# Altium PCB PCB5.PcbDoc (part 1 of 4)
Units mil, origin at the board's own origin, x right, y up, seen from the top; angles counter-clockwise.
Board outline 1968.5 x 2362.2 mil, 4 copper layers (Top Layer, GND, VCC, Bottom Layer), stack 30.634 mil thick; 134 components, 248 nets, 1063 pads, 694 vias.
Unrouted connection lines stored in the file: 163.
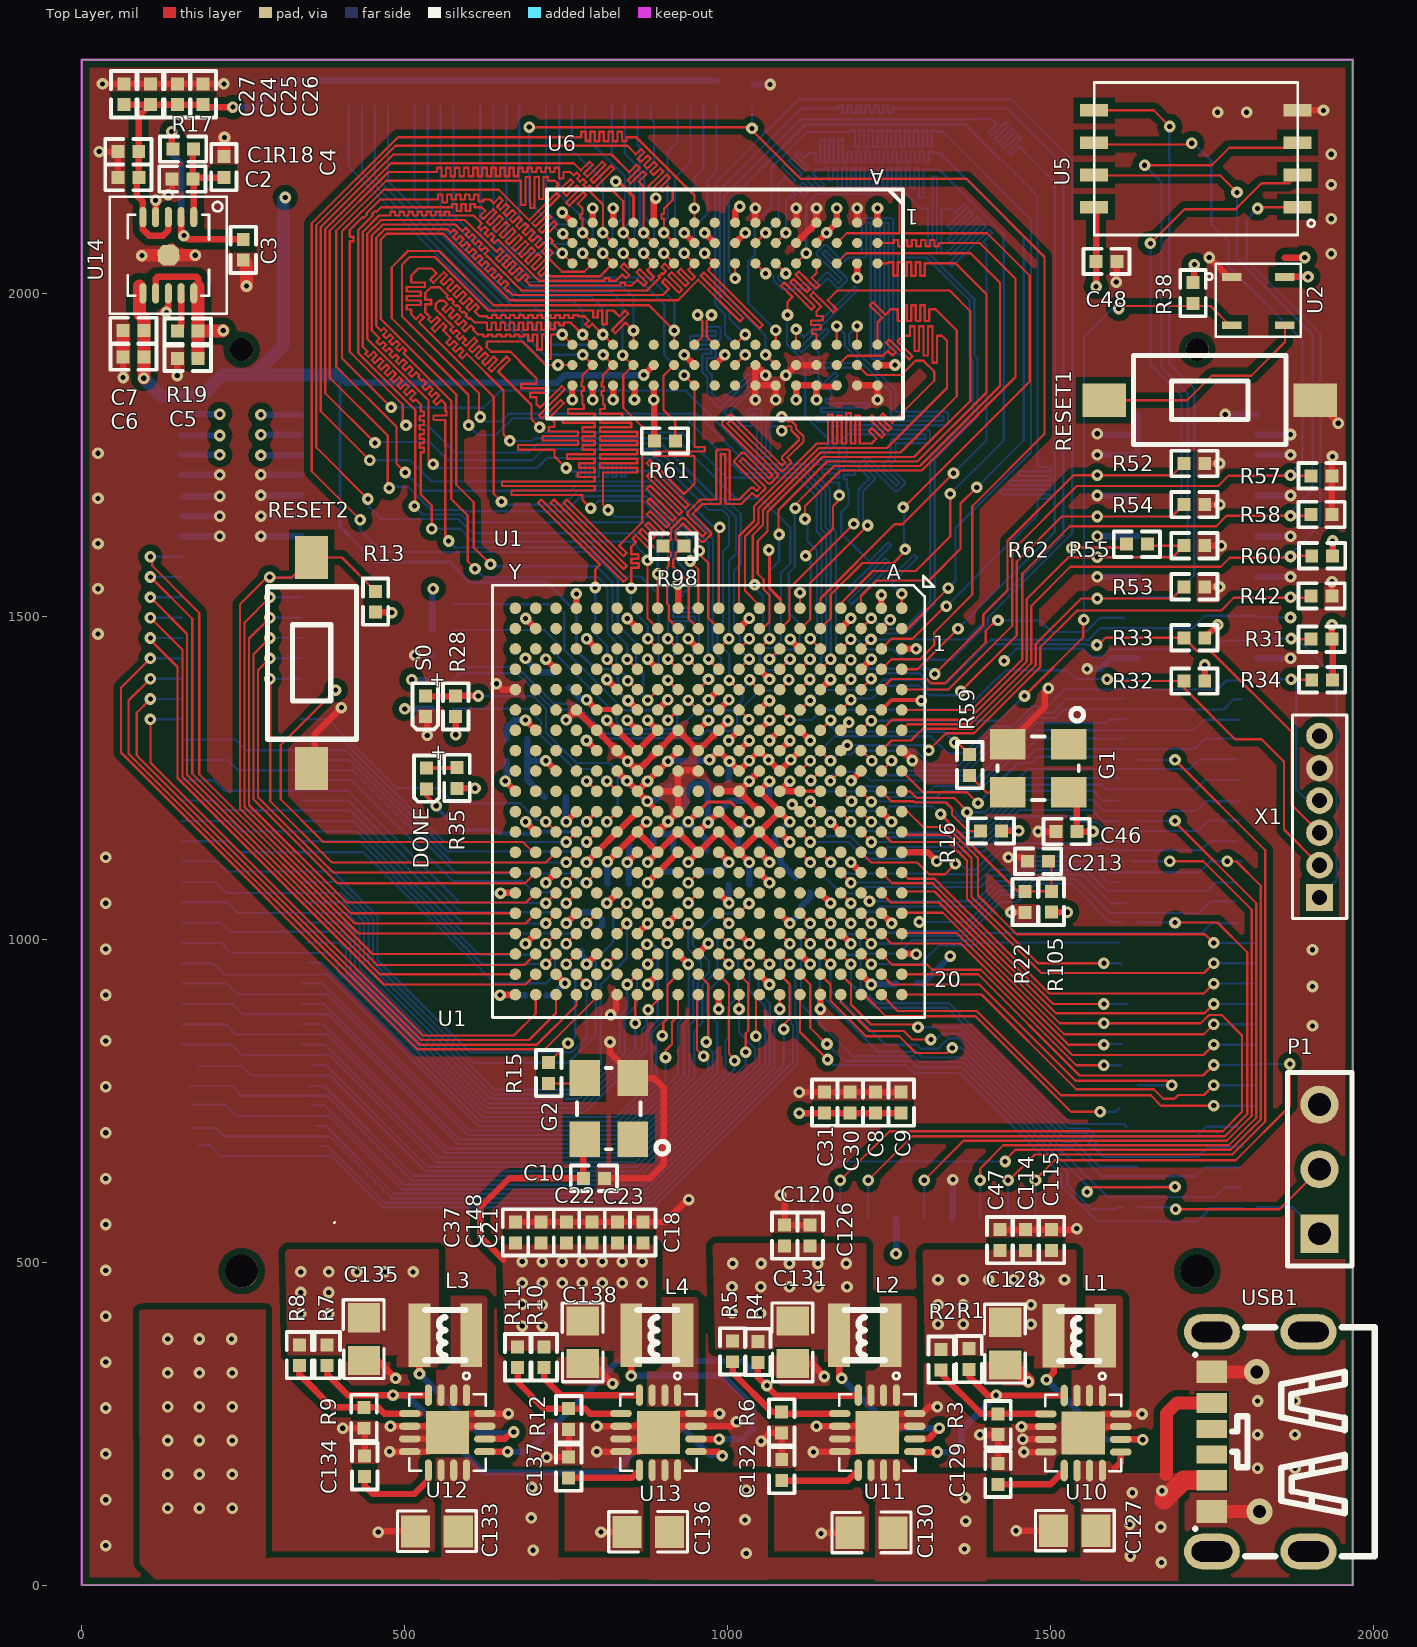
[diagram p0: Top Layer view]
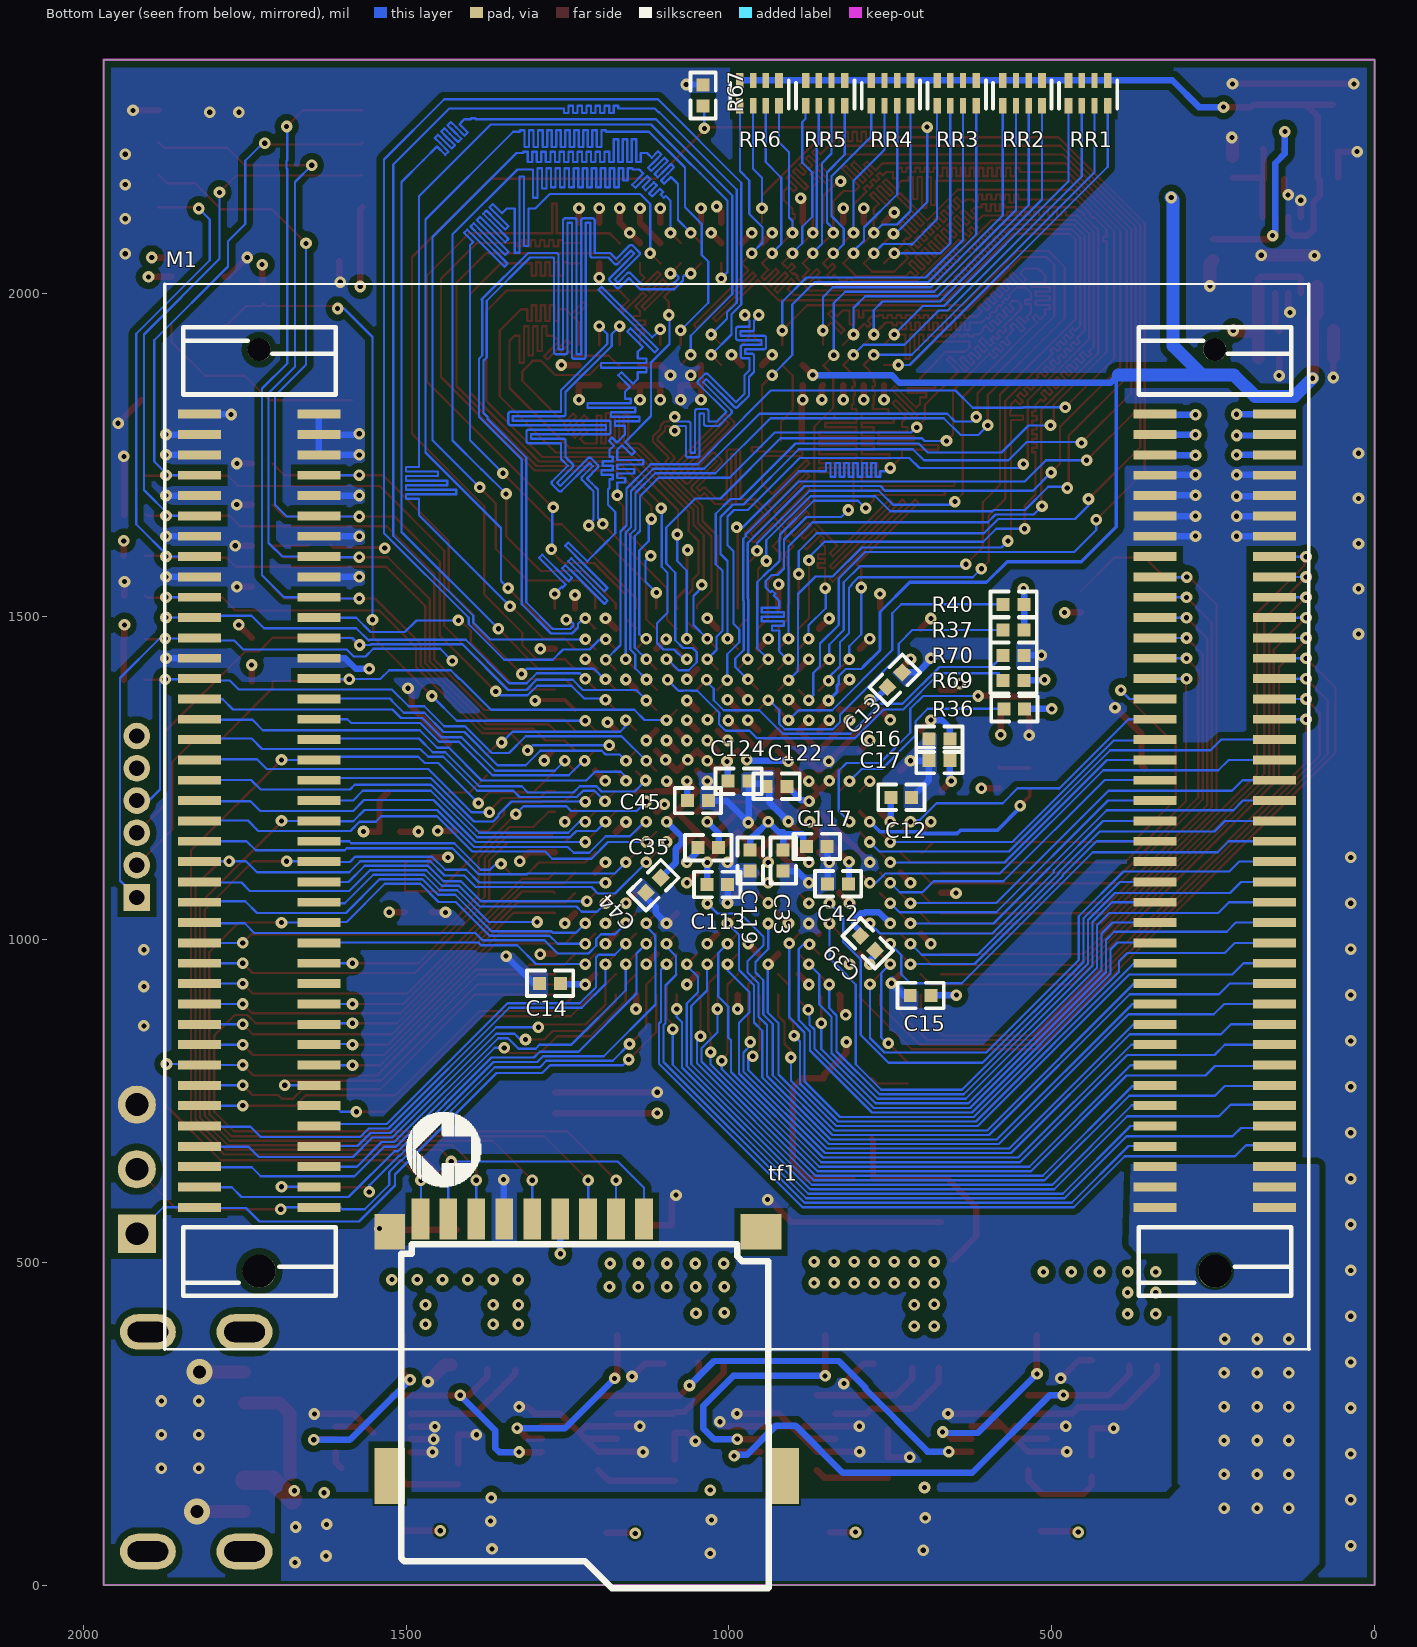
[diagram p1: Bottom Layer view, seen from below]
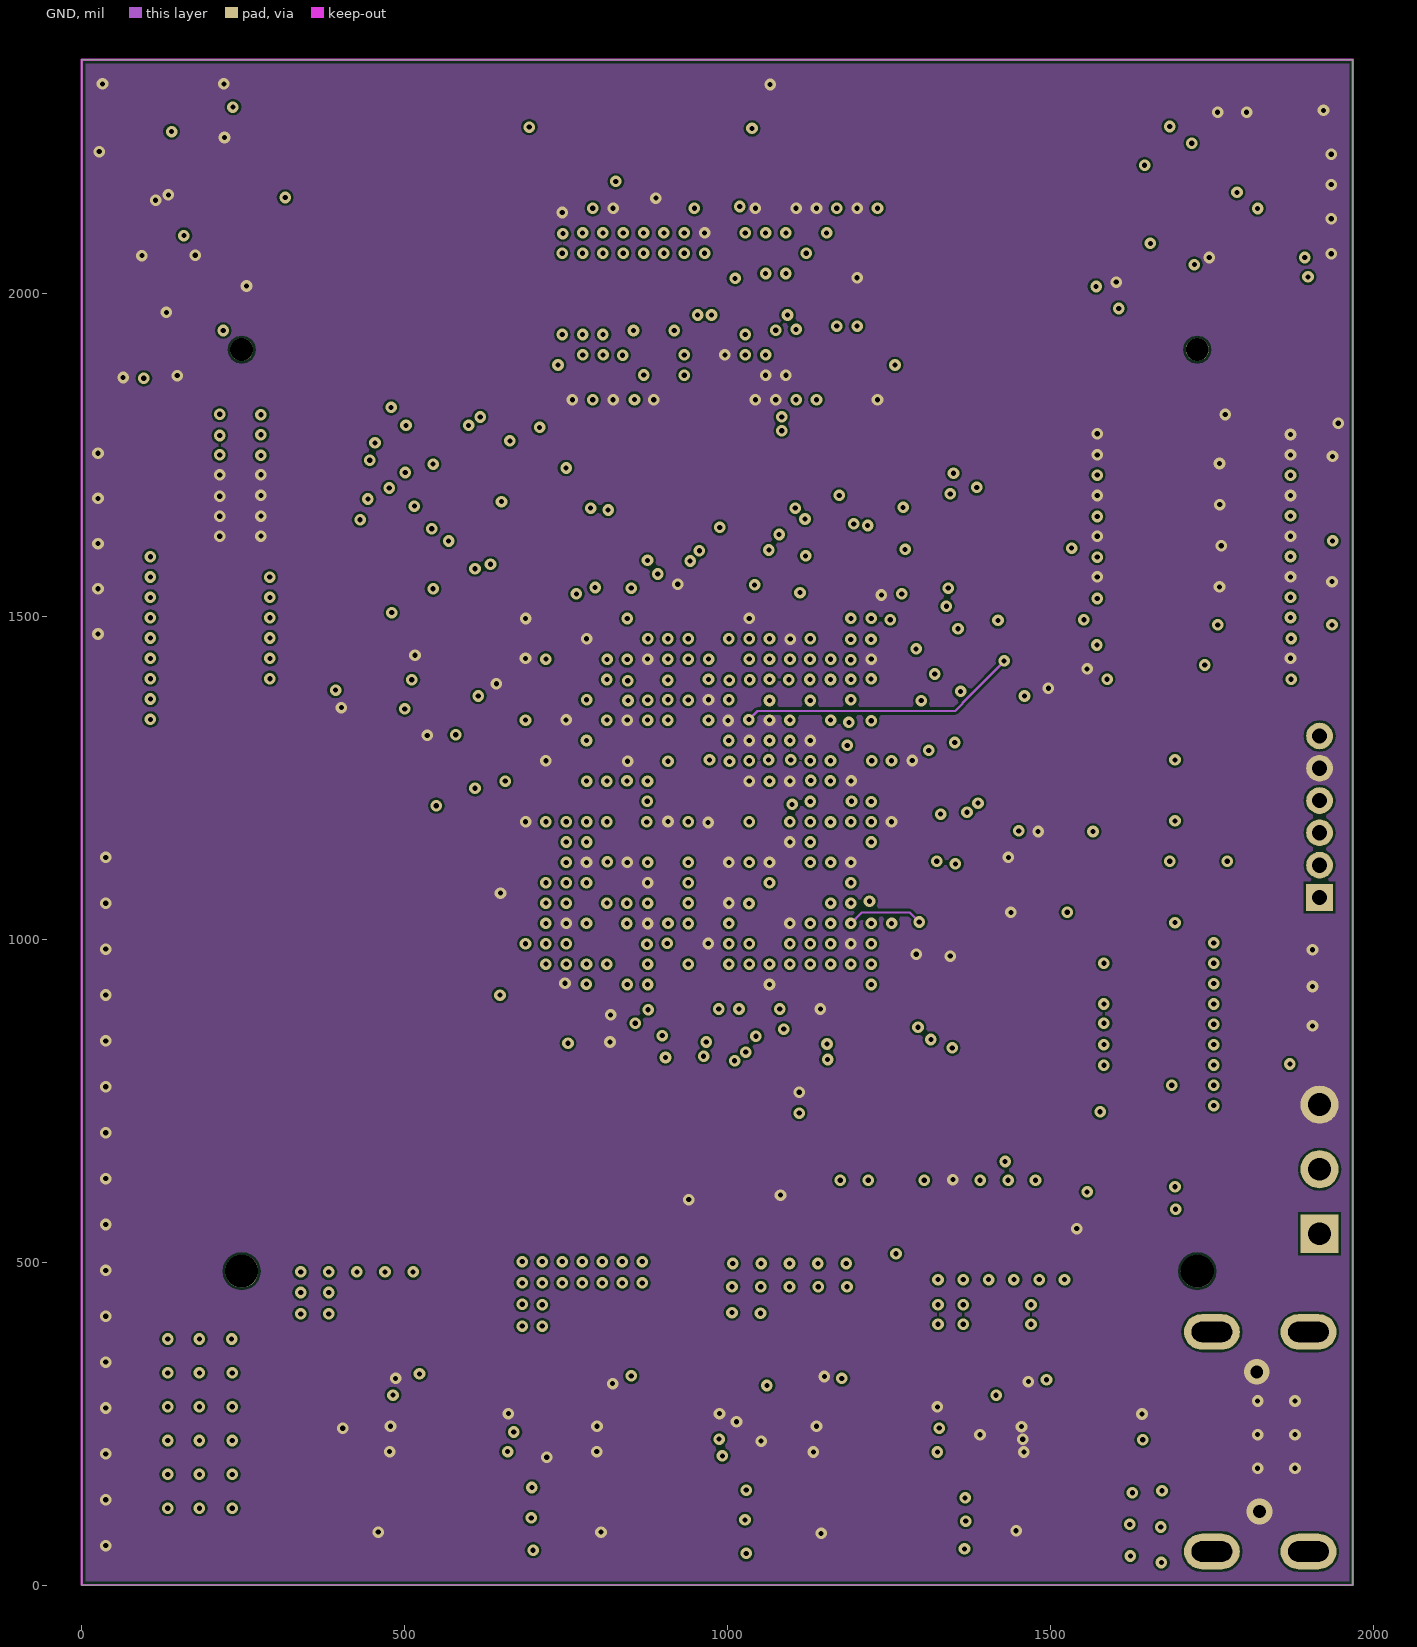
[diagram p2: GND]
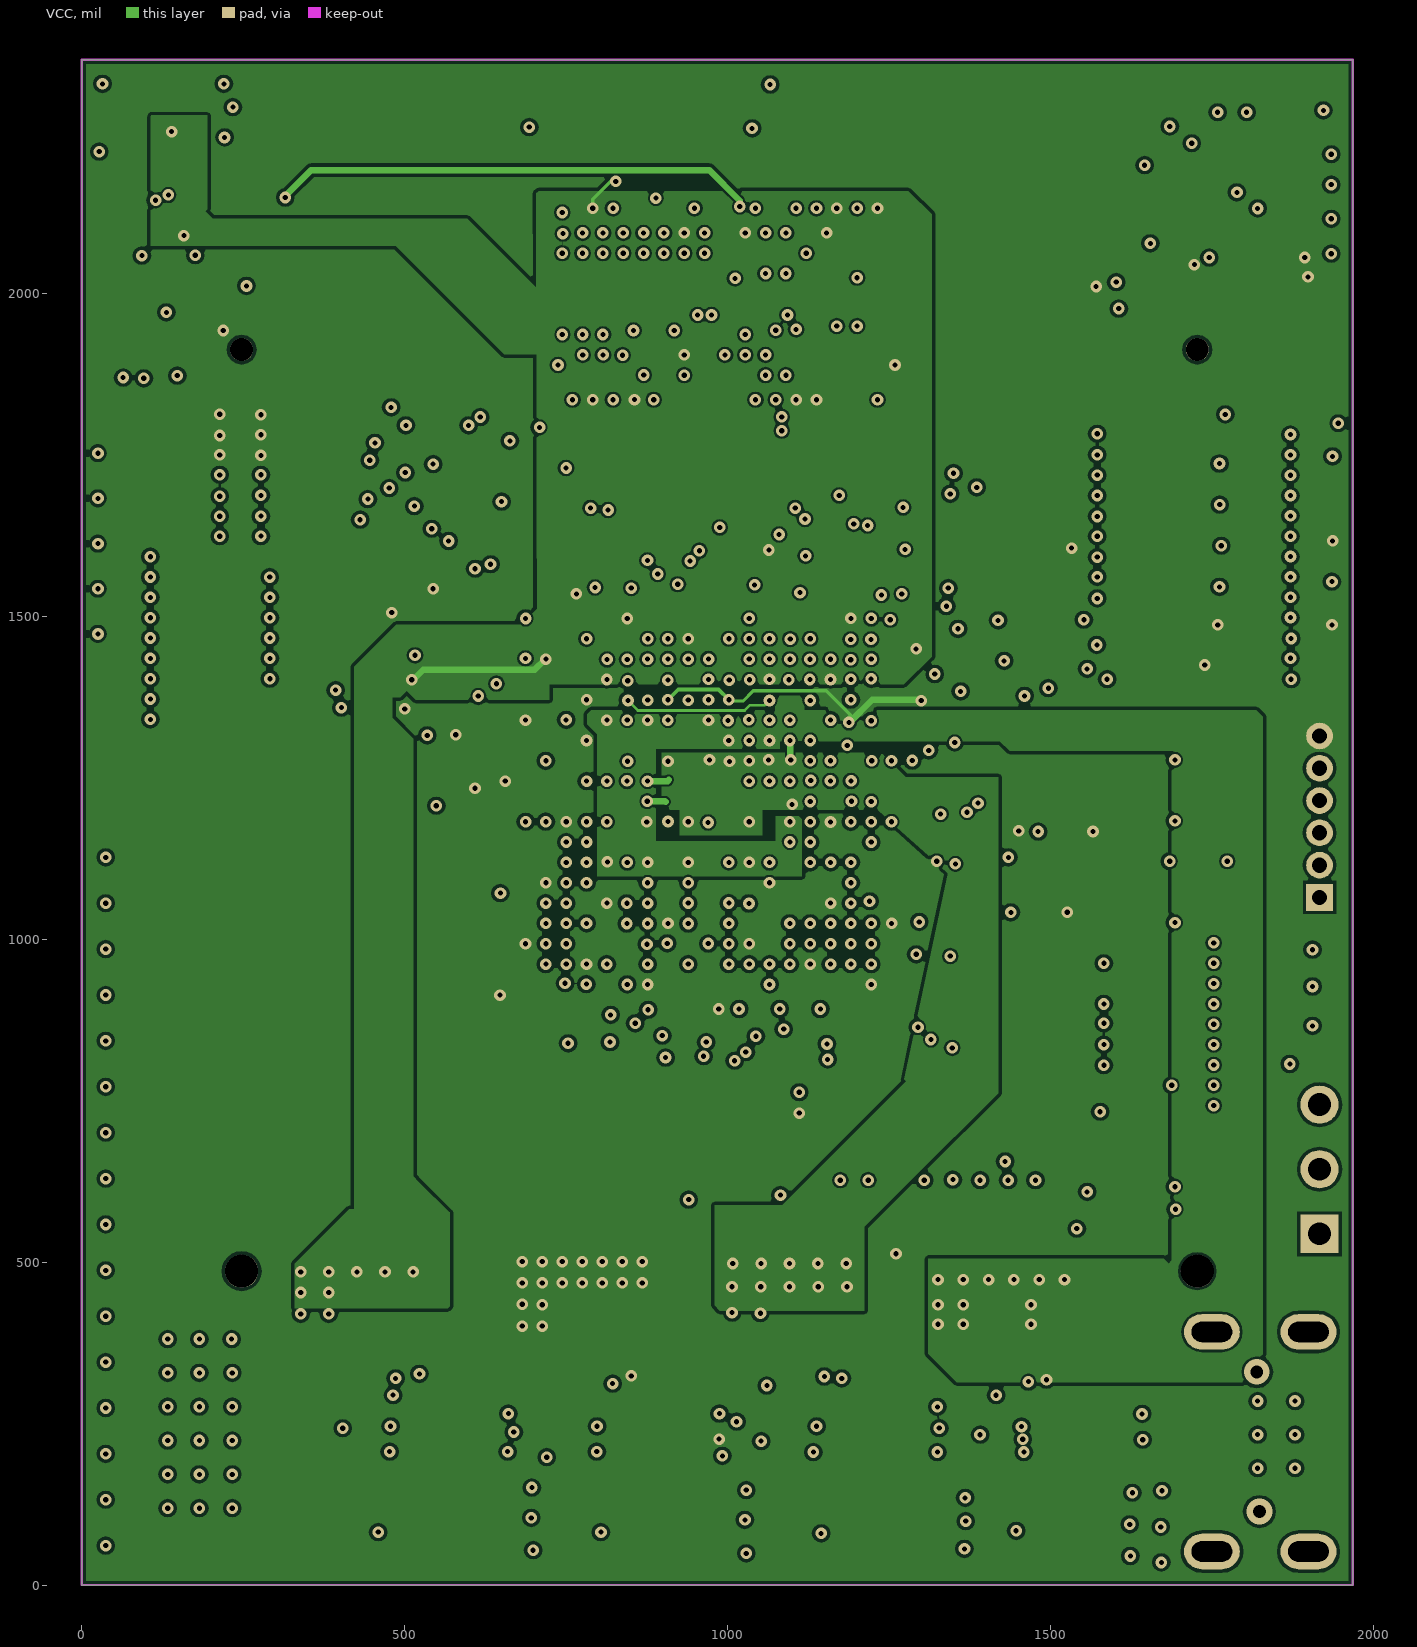
[diagram p3: VCC]

## Layer stack, top to bottom
Top Solder: solder mask 0.4, Solder Resist, Dk 3.5
Top Layer: signal copper 1.4
Dielectric 1: core 10, FR-4, Dk 4.2
GND: signal copper 1.417
Dielectric 3: prepreg 5, Dk 4.2
VCC: signal copper 1.417
Dielectric 2: core 10, Dk 4.2
Bottom Layer: signal copper 1.4
Bottom Solder: solder mask 0.4, Solder Resist, Dk 3.5

## Board outline
0,0 1968.5,0 1968.5,2362.2 0,2362.2

## Design rules (kind name [scope] priority, off if disabled: settings)
Clearance Clearance_2 [InNamedPolygon('POWER3')] p1: gap=10 ignorepadtopadclearanceinfootprint=FALSE
Clearance Clearance_1 [InNamedPolygon('POWER2')] p2: gap=5 ignorepadtopadclearanceinfootprint=FALSE
Clearance [All] p3: gap=3.5 ignorepadtopadclearanceinfootprint=FALSE except(0: Arc-Hole Track-Hole SMDPad-Hole THPad-Hole Via-Hole Fill-Hole Poly-Hole Region-Hole Text-Hole)
DiffPairsRouting [All] p1: maxlimit=10 minlimit=3.5 mostfreqgap=3.5 toplayer_minwidth=3.5 toplayer_maxwidth=3.5 toplayer_prefwidth=3.5 midlayer1_minwidth=3.5 midlayer1_maxwidth=3.5 midlayer1_prefwidth=3.5 midlayer2_minwidth=3.5 midlayer2_maxwidth=3.5 midlayer2_prefwidth=3.5 bottomlayer_minwidth=3.5 bottomlayer_maxwidth=3.5 bottomlayer_prefwidth=3.5 maxuncoupledlength=500
PolygonConnect [All] p1: connectstyle=Direct reliefconductorwidth=10 reliefentries=4 polygonreliefangle="90 Angle" airgapwidth=10
RoutingVias [All] p1: holewidth=8 width=18 viastyle="Through Hole" minholewidth=8 minwidth=18 maxholewidth=28 maxwidth=50
SolderMaskExpansion [All] p1: expansion=4
Width power [InNetClass('POWER')] p1: maxlimit=40 minlimit=3.5 preferedwidth=10
Width [All] p2: maxlimit=40 minlimit=3.5 preferedwidth=3.5
29 further rules are at their usual default settings.

## Classes and differential pairs
net class sd: MMC-CMD MMC-D0 MMC-D1 MMC-D2 MMC-D3 MMC-SCLK
net class ddr_dh: ADDR3-D8 ADDR3-D9 ADDR3-D10 ADDR3-D11 ADDR3-D12 ADDR3-D13 ADDR3-D14 ADDR3-D15 ADDR3-DM1 ADDR3-DQS1_N ADDR3-DQS1_P
net class b35_io: B35_0 B35_25 B35_L1_N B35_L1_P B35_L2_N B35_L2_P B35_L3_N B35_L3_P B35_L4_N B35_L4_P B35_L5_N B35_L5_P B35_L6_N B35_L6_P B35_L7_N B35_L7_P B35_L8_N B35_L8_P B35_L9_N B35_L9_P B35_L10_N B35_L10_P B35_L11_N B35_L11_P B35_L12_N B35_L12_P B35_L13_N B35_L13_P B35_L14_N B35_L14_P B35_L15_N B35_L15_P B35_L16_N B35_L16_P B35_L17_N B35_L17_P B35_L18_N B35_L18_P B35_L19_N B35_L19_P B35_L20_N B35_L20_P B35_L21_N B35_L21_P B35_L22_N B35_L22_P B35_L23_N B35_L23_P B35_L24_N B35_L24_P
net class b34_io: B34_0 B34_25 B34_L1_N B34_L1_P B34_L2_N B34_L2_P B34_L3_N B34_L3_P B34_L4_N B34_L4_P B34_L5_N B34_L5_P B34_L6_N B34_L6_P B34_L7_N B34_L7_P B34_L8_N B34_L8_P B34_L9_N B34_L9_P B34_L10_N B34_L10_P B34_L11_N B34_L11_P B34_L12_N B34_L12_P B34_L13_N B34_L13_P B34_L14_N B34_L14_P B34_L15_N B34_L15_P B34_L16_N B34_L16_P B34_L17_N B34_L17_P B34_L18_N B34_L18_P B34_L19_N B34_L19_P B34_L20_N B34_L20_P B34_L21_N B34_L21_P B34_L22_N B34_L22_P B34_L23_N B34_L23_P B34_L24_N B34_L24_P
net class psio: MIO9 MIO10 MIO11 MIO12 MIO13 MIO14 MIO15 MIO16 MIO17 MIO18 MIO19 MIO20 MIO21 MIO22 MIO23 MIO24 MIO25 MIO26 MIO27 MIO28 MIO29 MIO30 MIO31 MIO32 MIO33 MIO34 MIO35 MIO36 MIO37 MIO38 MIO39 MIO46 MIO47 MIO48 MIO49 MIO50 MIO51 MIO52 MIO53 MMC-CMD MMC-D0 MMC-D1 MMC-D2 MMC-D3
net class mode: ASPI-CS ASPI-DQ0/MODE0 ASPI-DQ1/MODE1 ASPI-DQ2/MODE2 ASPI-DQ3/MODE3 ASPI-SCK/MODE4 V500 V501
net class ddr_c: ADDR3-A0 ADDR3-A1 ADDR3-A2 ADDR3-A3 ADDR3-A4 ADDR3-A5 ADDR3-A6 ADDR3-A7 ADDR3-A8 ADDR3-A9 ADDR3-A10 ADDR3-A11 ADDR3-A12 ADDR3-A13 ADDR3-A14 ADDR3-BA0 ADDR3-BA1 ADDR3-BA2 ADDR3-CAS ADDR3-CKE0 ADDR3-ODT0 ADDR3-RAS ADDR3-S0 ADDR3-WE
net class ddr_x: ADDR3-A0 ADDR3-A1 ADDR3-A2 ADDR3-A3 ADDR3-A4 ADDR3-A5 ADDR3-A6 ADDR3-A7 ADDR3-A8 ADDR3-A9 ADDR3-A10 ADDR3-A11 ADDR3-A12 ADDR3-A13 ADDR3-A14 ADDR3-BA0 ADDR3-BA1 ADDR3-BA2 ADDR3-CAS ADDR3-CKE0 ADDR3-ODT0 ADDR3-RAS ADDR3-S0 ADDR3-WE
net class ddr_dl: ADDR3-D0 ADDR3-D1 ADDR3-D2 ADDR3-D3 ADDR3-D4 ADDR3-D5 ADDR3-D6 ADDR3-D7 ADDR3-DM0 ADDR3-DQS0_N ADDR3-DQS0_P
net class ddr_a: ADDR3-A0 ADDR3-A1 ADDR3-A2 ADDR3-A3 ADDR3-A4 ADDR3-A5 ADDR3-A6 ADDR3-A7 ADDR3-A8 ADDR3-A9 ADDR3-A10 ADDR3-A11 ADDR3-A12 ADDR3-A13 ADDR3-A14 ADDR3-CLK0_N ADDR3-CLK0_P
net class POWER: GND VCC-1V0 VCC-1V5 VCC-1V8 VCC-3V3
component class ZYNQ400-POWER: C42 C44 C45 C47 C113 C114 C115 C117 C119 C120 C122 C124 C126
component class ZYNQ400-MIO: C30 C31 C33 C35 C37 C39 C46 C48 C148 C213 DONE G1 R16 R22 R31 R32 R33 R34 R35 R36 R37 R38 R40 R42 R52 R53 R54 R55 R57 R58 R59 R60 R62 R105 RESET1 tf1 U1 U2 U5 X1
component class ZYNQ400-EMIO: C8 C9 C10 C12 C13 C14 C15 C16 C17 C18 C21 C22 C23 G2 R13 R15 R28 RESET2 S0
component class ZYNQ400-DDR: R61 R67 R69 R70 R98 RR1 RR2 RR3 RR4 RR5 RR6 U6
component class ZYNQ400-CONDIP: M1 P1
component class SYS-PS: C1 C2 C3 C4 C5 C6 C7 C24 C25 C26 C27 C127 C128 C129 C130 C131 C132 C133 C134 C135 C136 C137 C138 L1 L2 L3 L4 R1 R2 R3 R4 R5 R6 R7 R8 R9 R10 R11 R12 R17 R18 R19 U10 U11 U12 U13 U14 USB1
differential pair ADDR3-DQS1: +ADDR3-DQS1_P -ADDR3-DQS1_N
differential pair ADDR3-DQS0: +ADDR3-DQS0_P -ADDR3-DQS0_N
differential pair ADDR3-CLK0: +ADDR3-CLK0_P -ADDR3-CLK0_N

## Components (designator, comment, footprint, x,y, rotation, side; value= is the part's Value field where it differs from the comment)
C1 "10UF" 0402 72,2220 r0 top
C2 "10UF" 0402 72.14,2180 r0 top
C3 "10UF" 0402 250,2068 r90 top
C4 "10UF" 0402 220,2196 r90 top
C5 "10UF" 0402 164,1900 r180 top
C6 "10UF" 0402 80,1902 r0 top
C7 "10UF" 0402 79.86,1943 r0 top
C8 "470nf/6.3V" 0402 1229.52,747.14 r90 top
C9 "470nf/6.3V" 0402 1269,747.14 r90 top
C10 "0.1UF" 0402 793,630 r0 top value=0.1uF
C12 "470nf/6.3V" 0402 733,1220 r180 bottom
C13 "470nf/6.3V" 0402 743,1402 r135 bottom
C14 "4.7uf/6.3V" 0402 1277,932 r0 bottom
C15 "47uf/6.3V" 0402 703,913 r0 bottom
C16 "470nf/6.3V" 0402 674,1310 r0 bottom
C17 "470nf/6.3V" 0402 674,1277 r0 bottom
C18 "470nf/6.3V" 0402 869,546.14 r90 top
C21 "47uf/6.3V" 0402 750.57,546.14 r90 top
C22 "470nf/6.3V" 0402 790.05,546.14 r90 top
C23 "470nf/6.3V" 0402 829.52,546.14 r90 top
C24 "0.1UF" 0402 106.09,2308.86 r270 top
C25 "0.1UF" 0402 148,2308.86 r270 top
C26 "0.1UF" 0402 188,2308.86 r270 top
C27 "0.1UF" 0402 65,2308.86 r270 top
C30 "10UF/6.3V" 0402 1190.05,747.14 r90 top
C31 "4.7uf/6.3V" 0402 1150.57,747.14 r90 top
C33 "47uf/6.3V" 0402 916,1122 r270 bottom
C35 "470nf/6.3V" 0402 1032,1142 r0 bottom
C37 "0.1UF" 0402 671.62,546.14 r90 top value=0.1uF
C39 "10UF/6.3V" 0402 785,994 r45 bottom
C42 "470nf/6.3V" 0402 831,1086 r0 bottom
C44 "470nf/6.3V" 0402 1117,1084 r315 bottom
C45 "470nf/6.3V" 0402 1048,1215 r180 bottom
C46 "0.1UF" 0402 1525,1167 r180 top value=0.1uF
C47 "470nf/6.3V" 0402 1421.81,534.22 r90 top
C48 "0.1UF" 0402 1587,2050 r0 top value=0.1uF
C113 "470nf/6.3V" 0402 1018,1085 r180 bottom
C114 "470nf/6.3V" 0402 1461.85,534.22 r90 top
C115 "4.7uf/6.3V" 0402 1501.89,534.22 r90 top
C117 "4.7uf/6.3V" 0402 864,1144 r180 bottom
C119 "470nf/6.3V" 0402 967,1122 r270 bottom
C120 "470nf/6.3V" 0402 1088.37,541.14 r90 top
C122 "470nf/6.3V" 0402 926,1237 r0 bottom
C124 "4.7uf/6.3V" 0402 985,1245 r180 bottom
C126 "470nf/6.3V" 0402 1128,541.14 r90 top
C127 "10uF" C0805 1538,82 r0 top
C128 "10uF" C0805 1432,374 r90 top
C129 "0.1UF" 0402 1419,172 r270 top value=3.3nF
C130 "10uF" C0805 1223,79 r0 top
C131 "10uF" C0805 1103,376 r90 top
C132 "0.1UF" 0402 1084,178 r270 top value=3.3nF
C133 "10uF" C0805 550,81 r0 top
C134 "3.3F" 0402 438,184 r270 top value=3.3nF
C135 "10uF" C0805 439,381 r90 top
C136 "10uF" C0805 877,80 r0 top
C137 "0.1UF" 0402 754,182 r270 top value=3.3nF
C138 "10uF" C0805 778,376 r90 top
C148 "47uf/6.3V" 0402 711.1,546.14 r90 top
C213 "0.1uF" 0402 1481,1121 r180 top
DONE "LED" D0402 532,1361 r270 top
G1 "33.333M/3.3V" 3.2*2.5 1481,1265 r180 top value=33.33MHz
G2 "50M/3.3V" 3.2*2.5 816,738 r90 top value=33.33MHz
L1 "10uH" L1008 1545,386 r180 top
L2 "10uH" L1008 1212.85,387 r180 top
L3 "10uH" L1008 563,387 r180 top
L4 "10uH" L1008 891,387 r180 top
M1 "ZYNQ_CORE" ZYNQ7010&7020 340,585 r90 bottom locked
P1 "Header 3" HDR1X3 1917,544 r90 top
R1 "10K" 0402 1374,350 r90 top
R2 "4.99K" 0402 1331,349 r90 top
R3 "20K" 0402 1419,249 r90 top
R4 "10K" 0402 1047,361 r90 top
R5 "4.99K" 0402 1008,362 r90 top value=18.7K
R6 "15K" 0402 1083.85,251.91 r90 top
R7 "10K" 0402 380,356 r90 top
R8 "4.99K" 0402 337,356 r90 top value=13K
R9 "15K" 0402 437,259 r90 top
R10 "10K" 0402 716,352.86 r90 top
R11 "4.99K" 0402 675,352.86 r90 top value=56.2K
R12 "15K" 0402 754,257 r90 top value=18K
R13 "10K" 0402 455,1523 r270 top
R15 "33R" 0402 723,793 r90 top
R16 "10K" 0402 1408,1168 r0 top
R17 "1K" 0402 157,2224 r0 top value=4.7K
R18 "1K" 0402 155.78,2177.59 r180 top value=4.7K
R19 "1K" 0402 164,1942 r0 top value=100K
R22 "1K@0.1%" 0402 1461,1058 r270 top value=1K
R28 "1K" 0402 581,1250 r270 top
R31 "10K" 0402 1920,1465 r180 top
R32 "10K" 0402 1723,1400 r180 top
R33 "10K" 0402 1723,1467 r180 top
R34 "10K" 0402 1921,1402 r180 top
R35 "1K" 0402 579,1361 r270 top value=2K
R36 "10K" 0402 558,1357 r0 bottom
R37 "10K" 0402 559,1479 r180 bottom
R38 "10K" 0402 1721,2001 r90 top
R40 "10K" 0402 559,1519 r180 bottom
R42 "10K" 0402 1920,1532 r180 top
R52 "10K" 0402 1723,1737 r180 top
R53 "10K" 0402 1723,1546 r180 top
R54 "10K" 0402 1723,1673.33 r180 top
R55 "10K" 0402 1723,1609.67 r180 top
R57 "10K" 0402 1920,1718 r180 top
R58 "10K" 0402 1920,1658 r180 top
R59 "33R" 0402 1375,1270 r90 top
R60 "10K" 0402 1921,1594 r180 top
R61 "240R@1%" 0402 903,1772 r180 top value=240R
R62 "10K" 0402 1634,1612 r180 top
R67 "10K" 0402 1040,2307 r90 bottom
R69 "80.6R@1%" 0402 559,1401 r0 bottom value=80.6R
R70 "80.6R@1%" 0402 559,1440 r0 bottom value=80.6R
R98 "DNI/80.6R@1%" 0402 916.12,1609 r180 top value=80.6R
R105 "1K@0.1%" 0402 1501.64,1058.22 r90 top value=1K
RESET1 "SW-PB" "micro button_2_SMD" 1747,1835 r180 top
RESET2 "SW-PB" "micro button_2_SMD" 356,1428 r90 top
RR1 "40.2R@1%" R0402*4 443.68,2310.69 r0 bottom
RR2 "40.2R@1%" R0402*4 545.48,2310.69 r0 bottom
RR3 "40.2R@1%" R0402*4 647.28,2310.69 r0 bottom
RR4 "40.2R@1%" R0402*4 749.09,2310.69 r0 bottom
RR5 "40.2R@1%" R0402*4 850.89,2310.69 r0 bottom
RR6 "40.2R@1%" R0402*4 952.69,2310.69 r0 bottom
S0 "LED" D0402 534,1249 r270 top
tf1 "TF-SD" TF 1220,368 r270 bottom
U1 "XC7Z020CLG400" CLG400 971,1214 r270 top locked
U2 "TCM811TE" TCM811TERCTR 1822,1990 r270 top
U5 "S25FL256SAGNFI00" MLP8 1744,2209 r180 top locked
U6 "MT41J128M16HA-187E:D" FBGA96 996,1984 r270 top locked
U10 "TLV62130" TLV62130RGT 1551,235 r180 top
U11 "TLV62130" TLV62130RGT 1232,235.59 r180 top
U12 "TLV62130" TLV62130RGT 566.15,235.59 r180 top
U13 "TLV62130" TLV62130RGT 893.15,235.59 r180 top
U14 "TPS51200DRCR" TPS_QFN10 134,2060 r270 top
USB1 "TYPE-C 6P" TYPE-C-SMD_TYPE-C-6P 1825,222 r90 top locked
X1 "JTAG" 1.27*6 1917,1065 r90 top

## Footprints (in the part's own frame and the unit in brackets; to place one, negate y for a bottom-side part, rotate by r counter-clockwise, add the part's x,y. Pads: shape width x height; smd on the part's side, far side on the other; paste and mask are expansions set on the pad)
1.27*6 [mm]
  rect 1.05x1.05 hole 0.6: 1(0,0)
  round 1.05 hole 0.6: 2(1.27,0) 3(2.54,0) 4(3.81,0) 5(5.08,0) 6(6.35,0)
  silkscreen extent -0.82,-1.07 7.17,1.07
3.2*2.5 [mm]
  rect 1.4x1.2 smd: 1(-1.2,-0.95) 2(1.2,-0.95) 3(1.2,0.95) 4(-1.2,0.95)
  silkscreen extent -1.79,-2.36 1.6,1.25
0402 [mm]
  rect 0.51x0.51 smd: 1(-0.41,0) 2(0.41,0)
  silkscreen extent -0.91,-0.5 0.91,0.5
C0805 [mil]
  rect 45x50 smd: 1(-33,2) 2(33,2)
  silkscreen extent -61,-29 61,34
CLG400 [mil] "CLG400"
  round 18 smd: A1(-298.85,298.85) A2(-267.35,298.85) A3(-235.85,298.85) A4(-204.35,298.85) A5(-172.85,298.85) A6(-141.35,298.85) A7(-109.85,298.85) A8(-78.35,298.85) A9(-46.85,298.85) A10(-15.45,298.85) A11(16.15,298.85) A12(47.55,298.85) A13(79.05,298.85) A14(110.55,298.85) A15(142.05,298.85) A16(173.55,298.85) A17(205.05,298.85) A18(236.55,298.85) A19(268.05,298.85) A20(299.55,298.85) B1(-298.85,267.35) B2(-267.35,267.35) B3(-235.85,267.35) B4(-204.35,267.35) B5(-172.85,267.35) B6(-141.35,267.35) B7(-109.85,267.35) B8(-78.35,267.35) B9(-46.85,267.35) B10(-15.45,267.35) B11(16.15,267.35) B12(47.55,267.35) B13(79.05,267.35) B14(110.55,267.35) B15(142.05,267.35) B16(173.55,267.35) B17(205.05,267.35) B18(236.55,267.35) B19(268.05,267.35) B20(299.55,267.35) C1(-298.85,235.85) C2(-267.35,235.85) C3(-235.85,235.85) C4(-204.35,235.85) C5(-172.85,235.85) C6(-141.35,235.85) C7(-109.85,235.85) C8(-78.35,235.85) C9(-46.85,235.85) C10(-15.45,235.85) C11(16.15,235.85) C12(47.55,235.85) C13(79.05,235.85) C14(110.55,235.85) C15(142.05,235.85) C16(173.55,235.85) C17(205.05,235.85) C18(236.55,235.85) C19(268.05,235.85) C20(299.55,235.85) D1(-298.85,204.35) D2(-267.35,204.35) D3(-235.85,204.35) D4(-204.35,204.35) D5(-172.85,204.35) D6(-141.35,204.35) D7(-109.85,204.35) D8(-78.35,204.35) D9(-46.85,204.35) D10(-15.45,204.35) D11(16.15,204.35) D12(47.55,204.35) D13(79.05,204.35) D14(110.55,204.35) D15(142.05,204.35) D16(173.55,204.35) D17(205.05,204.35) D18(236.55,204.35) D19(268.05,204.35) D20(299.55,204.35) E1(-298.85,172.85) E2(-267.35,172.85) E3(-235.85,172.85) E4(-204.35,172.85) E5(-172.85,172.85) E6(-141.35,172.85) E7(-109.85,172.85) E8(-78.35,172.85) E9(-46.85,172.85) E10(-15.45,172.85) E11(16.15,172.85) E12(47.55,172.85) E13(79.05,172.85) E14(110.55,172.85) E15(142.05,172.85) E16(173.55,172.85) E17(205.05,172.85) E18(236.55,172.85) E19(268.05,172.85) E20(299.55,172.85) F1(-298.85,141.35) F2(-267.35,141.35) F3(-235.85,141.35) F4(-204.35,141.35) F5(-172.85,141.35) F6(-141.35,141.35) F7(-109.85,141.35) F8(-78.35,141.35) F9(-46.85,141.35) F10(-15.45,141.35) F11(16.15,141.35) F12(47.55,141.35) F13(79.05,141.35) F14(110.55,141.35) F15(142.05,141.35) F16(173.55,141.35) F17(205.05,141.35) F18(236.55,141.35) F19(268.05,141.35) F20(299.55,141.35) G1(-298.85,109.85) G2(-267.35,109.85) G3(-235.85,109.85) G4(-204.35,109.85) G5(-172.85,109.85) G6(-141.35,109.85) G7(-109.85,109.85) G8(-78.35,109.85) G9(-46.85,109.85) G10(-15.45,109.85) G11(16.15,109.85) G12(47.55,109.85) G13(79.05,109.85) G14(110.55,109.85) G15(142.05,109.85) G16(173.55,109.85) G17(205.05,109.85) G18(236.55,109.85) G19(268.05,109.85) G20(299.55,109.85) H1(-298.85,78.35) H2(-267.35,78.35) H3(-235.85,78.35) H4(-204.35,78.35) H5(-172.85,78.35) H6(-141.35,78.35) H7(-109.85,78.35) H8(-78.35,78.35) H9(-46.85,78.35) H10(-15.45,78.35) H11(16.15,78.35) H12(47.55,78.35) H13(79.05,78.35) H14(110.55,78.35) H15(142.05,78.35) H16(173.55,78.35) H17(205.05,78.35) H18(236.55,78.35) H19(268.05,78.35) H20(299.55,78.35) J1(-298.85,46.85) J2(-267.35,46.85) J3(-235.85,46.85) J4(-204.35,46.85) J5(-172.85,46.85) J6(-141.35,46.85) J7(-109.85,46.85) J8(-78.35,46.85) J9(-46.85,46.85) J10(-15.45,46.85) J11(16.15,46.85) J12(47.55,46.85) J13(79.05,46.85) J14(110.55,46.85) J15(142.05,46.85) J16(173.55,46.85) J17(205.05,46.85) J18(236.55,46.85) J19(268.05,46.85) J20(299.55,46.85) K1(-298.85,15.45) K2(-267.35,15.45) K3(-235.85,15.45) K4(-204.35,15.45) K5(-172.85,15.45) K6(-141.35,15.45) K7(-109.85,15.45) K8(-78.35,15.45) K9(-46.85,15.45) K10(-15.45,15.45) K11(16.15,15.45) K12(47.55,15.45) K13(79.05,15.45) K14(110.55,15.45) K15(142.05,15.45) K16(173.55,15.45) K17(205.05,15.45) K18(236.55,15.45) K19(268.05,15.45) K20(299.55,15.45) L1(-298.85,-16.15) L2(-267.35,-16.15) L3(-235.85,-16.15) L4(-204.35,-16.15) L5(-172.85,-16.15) L6(-141.35,-16.15) L7(-109.85,-16.15) L8(-78.35,-16.15) L9(-46.85,-16.15) L10(-15.45,-16.15) L11(16.15,-16.15) L12(47.55,-16.15) L13(79.05,-16.15) L14(110.55,-16.15) L15(142.05,-16.15) L16(173.55,-16.15) L17(205.05,-16.15) L18(236.55,-16.15) L19(268.05,-16.15) L20(299.55,-16.15) M1(-298.85,-47.55) M2(-267.35,-47.55) M3(-235.85,-47.55) M4(-204.35,-47.55) M5(-172.85,-47.55) M6(-141.35,-47.55) M7(-109.85,-47.55) M8(-78.35,-47.55) M9(-46.85,-47.55) M10(-15.45,-47.55) M11(16.15,-47.55) M12(47.55,-47.55) M13(79.05,-47.55) M14(110.55,-47.55) M15(142.05,-47.55) M16(173.55,-47.55) M17(205.05,-47.55) M18(236.55,-47.55) M19(268.05,-47.55) M20(299.55,-47.55) N1(-298.85,-79.05) N2(-267.35,-79.05) N3(-235.85,-79.05) N4(-204.35,-79.05) N5(-172.85,-79.05) N6(-141.35,-79.05) N7(-109.85,-79.05) N8(-78.35,-79.05) N9(-46.85,-79.05) N10(-15.45,-79.05) N11(16.15,-79.05) N12(47.55,-79.05) N13(79.05,-79.05) N14(110.55,-79.05) N15(142.05,-79.05) N16(173.55,-79.05) N17(205.05,-79.05) N18(236.55,-79.05) N19(268.05,-79.05) N20(299.55,-79.05) P1(-298.85,-110.55) P2(-267.35,-110.55) P3(-235.85,-110.55) P4(-204.35,-110.55) P5(-172.85,-110.55) P6(-141.35,-110.55) P7(-109.85,-110.55) P8(-78.35,-110.55) P9(-46.85,-110.55) P10(-15.45,-110.55) P11(16.15,-110.55) P12(47.55,-110.55) P13(79.05,-110.55) P14(110.55,-110.55) P15(142.05,-110.55) P16(173.55,-110.55) P17(205.05,-110.55) P18(236.55,-110.55) P19(268.05,-110.55) P20(299.55,-110.55) R1(-298.85,-142.05) R2(-267.35,-142.05) R3(-235.85,-142.05) R4(-204.35,-142.05) R5(-172.85,-142.05) R6(-141.35,-142.05) R7(-109.85,-142.05) R8(-78.35,-142.05) R9(-46.85,-142.05) R10(-15.45,-142.05) R11(16.15,-142.05) R12(47.55,-142.05) R13(79.05,-142.05) R14(110.55,-142.05) R15(142.05,-142.05) R16(173.55,-142.05) R17(205.05,-142.05) R18(236.55,-142.05) R19(268.05,-142.05) R20(299.55,-142.05) T1(-298.85,-173.55) T2(-267.35,-173.55) T3(-235.85,-173.55) T4(-204.35,-173.55) T5(-172.85,-173.55) T6(-141.35,-173.55) T7(-109.85,-173.55) T8(-78.35,-173.55) T9(-46.85,-173.55) T10(-15.45,-173.55) T11(16.15,-173.55) T12(47.55,-173.55) T13(79.05,-173.55) T14(110.55,-173.55) T15(142.05,-173.55) T16(173.55,-173.55) T17(205.05,-173.55) T18(236.55,-173.55) T19(268.05,-173.55) T20(299.55,-173.55) U1(-298.85,-205.05) U2(-267.35,-205.05) U3(-235.85,-205.05) U4(-204.35,-205.05) U5(-172.85,-205.05) U6(-141.35,-205.05) U7(-109.85,-205.05) U8(-78.35,-205.05) U9(-46.85,-205.05) U10(-15.45,-205.05) U11(16.15,-205.05) U12(47.55,-205.05) U13(79.05,-205.05) U14(110.55,-205.05) U15(142.05,-205.05) U16(173.55,-205.05) U17(205.05,-205.05) U18(236.55,-205.05) U19(268.05,-205.05) U20(299.55,-205.05) V1(-298.85,-236.55) V2(-267.35,-236.55) V3(-235.85,-236.55) V4(-204.35,-236.55) V5(-172.85,-236.55) V6(-141.35,-236.55) V7(-109.85,-236.55) V8(-78.35,-236.55) V9(-46.85,-236.55) V10(-15.45,-236.55) V11(16.15,-236.55) V12(47.55,-236.55) V13(79.05,-236.55) V14(110.55,-236.55) V15(142.05,-236.55) V16(173.55,-236.55) V17(205.05,-236.55) V18(236.55,-236.55) V19(268.05,-236.55) V20(299.55,-236.55) W1(-298.85,-268.05) W2(-267.35,-268.05) W3(-235.85,-268.05) W4(-204.35,-268.05) W5(-172.85,-268.05) W6(-141.35,-268.05) W7(-109.85,-268.05) W8(-78.35,-268.05) W9(-46.85,-268.05) W10(-15.45,-268.05) W11(16.15,-268.05) W12(47.55,-268.05) W13(79.05,-268.05) W14(110.55,-268.05) W15(142.05,-268.05) W16(173.55,-268.05) W17(205.05,-268.05) W18(236.55,-268.05) W19(268.05,-268.05) W20(299.55,-268.05) Y1(-298.85,-299.55) Y2(-267.35,-299.55) Y3(-235.85,-299.55) Y4(-204.35,-299.55) Y5(-172.85,-299.55) Y6(-141.35,-299.55) Y7(-109.85,-299.55) Y8(-78.35,-299.55) Y9(-46.85,-299.55) Y10(-15.45,-299.55) Y11(16.15,-299.55) Y12(47.55,-299.55) Y13(79.05,-299.55) Y14(110.55,-299.55) Y15(142.05,-299.55) Y16(173.55,-299.55) Y17(205.05,-299.55) Y18(236.55,-299.55) Y19(268.05,-299.55) Y20(299.55,-299.55)
  silkscreen extent -349,-335 335,349
D0402 [mm]
  rect 0.51x0.51 smd: 1(-0.41,0) 2(0.41,0)
  silkscreen extent -0.91,-0.5 0.91,0.5
FBGA96 [mm]
  round 0.4 smd: A1(-3.2,6) A2(-2.4,6) A3(-1.6,6) A7(1.6,6) A8(2.4,6) A9(3.2,6) B1(-3.2,5.2) B2(-2.4,5.2) B3(-1.6,5.2) B7(1.6,5.2) B8(2.4,5.2) B9(3.2,5.2) C1(-3.2,4.4) C2(-2.4,4.4) C3(-1.6,4.4) C7(1.6,4.4) C8(2.4,4.4) C9(3.2,4.4) D1(-3.2,3.6) D2(-2.4,3.6) D3(-1.6,3.6) D7(1.6,3.6) D8(2.4,3.6) D9(3.2,3.6) E1(-3.2,2.8) E2(-2.4,2.8) E3(-1.6,2.8) E7(1.6,2.8) E8(2.4,2.8) E9(3.2,2.8) F1(-3.2,2) F2(-2.4,2) F3(-1.6,2) F7(1.6,2) F8(2.4,2) F9(3.2,2) G1(-3.2,1.2) G2(-2.4,1.2) G3(-1.6,1.2) G7(1.6,1.2) G8(2.4,1.2) G9(3.2,1.2) H1(-3.2,0.4) H2(-2.4,0.4) H3(-1.6,0.4) H7(1.6,0.4) H8(2.4,0.4) H9(3.2,0.4) J1(-3.2,-0.4) J2(-2.4,-0.4) J3(-1.6,-0.4) J7(1.6,-0.4) J8(2.4,-0.4) J9(3.2,-0.4) K1(-3.2,-1.2) K2(-2.4,-1.2) K3(-1.6,-1.2) K7(1.6,-1.2) K8(2.4,-1.2) K9(3.2,-1.2) L1(-3.2,-2) L2(-2.4,-2) L3(-1.6,-2) L7(1.6,-2) L8(2.4,-2) L9(3.2,-2) M1(-3.2,-2.8) M2(-2.4,-2.8) M3(-1.6,-2.8) M7(1.6,-2.8) M8(2.4,-2.8) M9(3.2,-2.8) N1(-3.2,-3.6) N2(-2.4,-3.6) N3(-1.6,-3.6) N7(1.6,-3.6) N8(2.4,-3.6) N9(3.2,-3.6) P1(-3.2,-4.4) P2(-2.4,-4.4) P3(-1.6,-4.4) P7(1.6,-4.4) P8(2.4,-4.4) P9(3.2,-4.4) R1(-3.2,-5.2) R2(-2.4,-5.2) R3(-1.6,-5.2) R7(1.6,-5.2) R8(2.4,-5.2) R9(3.2,-5.2) T1(-3.2,-6) T2(-2.4,-6) T3(-1.6,-6) T7(1.6,-6) T8(2.4,-6) T9(3.2,-6)
  silkscreen extent -4.5,-7 4.5,7
HDR1X3 [mm] "Connector; Header; 3 Position"
  rect 1.5x1.5 hole 0.9: 1(0,0)
  round 1.5 hole 0.9: 2(2.54,0) 3(5.08,0)
  silkscreen extent -1.27,-1.27 6.35,1.27
L1008 [mil]
  rect 33.5x98.4 smd: 1(-39.92,0) 2(40.08,0)
  silkscreen extent -31,-39 31,39
"micro button_2_SMD" [mm]
  rect 1.7x1.3 smd: 1(-4.15,0) 2(4.15,0)
  silkscreen extent -3,-1.76 3,1.74, body extent -4.5,-1.75 4.5,1.75, height 4.51
MLP8 [mil] "MLP8"
  rect 43.3x19.7 smd: 1(-138.85,75) 2(-138.85,25) 3(-138.85,-25) 4(-138.85,-75) 5(176.15,-75) 6(176.15,-25) 7(176.15,25) 8(176.15,75)
  silkscreen extent -165,-118 176,118
R0402*4 [mm]
  rect 0.3x0.6 smd: 1(-0.77,-0.5) 4(0.77,-0.5) 5(0.77,0.5) 8(-0.77,0.5)
  rect 0.25x0.6 smd: 2(-0.25,-0.5) 3(0.25,-0.5) 6(0.25,0.5) 7(-0.25,0.5)
  silkscreen extent -1.15,-0.5 1.15,0.6
TCM811TERCTR [mil] "TCM811TERCTR"
  rect 12x30 smd: 1(-36,-41.3) 2(39,-41.3) 3(39,41.3) 4(-36,41.3)
  silkscreen extent -57,-81 57,66
TF [mm]
  rect 1.4x1.6 smd: 0(-4.55,6.85)
  rect 1.6x0.7 smd: 1(-5.05,2.25) 2(-5.05,1.15) 3(-5.05,0.05) 4(-5.05,-1.05) 5(-5.05,-2.15) 6(-5.05,-3.25) 7(-5.05,-4.35) 8(-5.05,-5.45) 9(-5.05,-6.55)
  rect 1.4x1.2 smd: 10(-4.55,-7.75)
  rect 2.2x1.2 smd: 11(5.05,-7.75) 12(5.05,7.75)
  silkscreen extent -4.06,-7.29 9.47,7.15
TLV62130RGT [mil] "TLV62130RGT"
  oval 11x33.5 smd: 1(-29.5,-58.6) 2(-9.8,-58.6) 3(9.8,-58.6) 4(29.5,-58.6) 9(29.5,57.6) 10(9.8,57.6) 11(-9.8,57.6) 12(-29.5,57.6)
  oval 33.5x11 smd: 5(58.1,-30) 6(58.1,-10.3) 7(58.1,9.3) 8(58.1,29) 13(-58.1,29) 14(-58.1,9.3) 15(-58.1,-10.3) 16(-58.1,-30)
  rect 66.9x66.9 smd: 20(0,-0.5)
  silkscreen extent -59,-94 59,59
TPS_QFN10 [mil] "TPS_QFN10"
  oval 31.5x11 smd: 1(-58.7,39.4) 2(-58.7,19.7) 3(-58.7,0) 4(-58.7,-19.7) 5(-58.7,-39.4) 6(59.5,-39.4) 7(59.5,-19.7) 8(59.5,0) 9(59.5,19.7) 10(59.5,39.4)
  oct 33.3x33.3 smd rot 3: 11(0.4,0)
  silkscreen extent -90,-91 91,91
TYPE-C-SMD_TYPE-C-6P [mm]
  oval 1.4x2.2 hole 0.8 slot 1.6 at 90 deg: 7(-4.32,-1.9) 7(-4.32,1.9) 7(4.32,-1.9) 7(4.32,1.9)
  rect 0.7x1.2 smd: A5(-0.5,1.9) B5(0.5,1.9)
  rect 0.8x1.2 smd: A9(1.52,1.9) B9(-1.52,1.9)
  rect 0.9x1.2 smd: A12(2.75,1.9) B12(-2.75,1.9)
  silkscreen extent -4.5,-4.5 4.5,2.55
ZYNQ7010&7020 [mm]
  rect 0.35x1.7 smd: J1_1(0,0) J1_2(0,-4.7) J1_3(0.8,0) J1_4(0.8,-4.7) J1_5(1.6,0) J1_6(1.6,-4.7) J1_7(2.4,0) J1_8(2.4,-4.7) J1_9(3.2,0) J1_10(3.2,-4.7) J1_11(4,0) J1_12(4,-4.7) J1_13(4.8,0) J1_14(4.8,-4.7) J1_15(5.6,0) J1_16(5.6,-4.7) J1_17(6.4,0) J1_18(6.4,-4.7) J1_19(7.2,0) J1_20(7.2,-4.7) J1_21(8.001,0) J1_22(8.001,-4.7) J1_23(8.801,0) J1_24(8.801,-4.7) J1_25(9.601,0) J1_26(9.601,-4.7) J1_27(10.401,0) J1_28(10.401,-4.7) J1_29(11.201,0) J1_30(11.201,-4.7) J1_31(12.001,0) J1_32(12.001,-4.7) J1_33(12.801,0) J1_34(12.801,-4.7) J1_35(13.601,0) J1_36(13.601,-4.7) J1_37(14.401,0) J1_38(14.401,-4.7) J1_39(15.201,0) J1_40(15.201,-4.7) J1_41(16.001,0) J1_42(16.001,-4.7) J1_43(16.801,0) J1_44(16.801,-4.7) J1_45(17.601,0) J1_46(17.601,-4.7) J1_47(18.401,0) J1_48(18.401,-4.7) J1_49(19.201,0) J1_50(19.201,-4.7) J1_51(20.001,0) J1_52(20.001,-4.7) J1_53(20.801,0) J1_54(20.801,-4.7) J1_55(21.601,0) J1_56(21.601,-4.7) J1_57(22.401,0) J1_58(22.401,-4.7) J1_59(23.201,0) J1_60(23.201,-4.7) J1_61(24.001,0) J1_62(24.001,-4.7) J1_63(24.801,0) J1_64(24.801,-4.7) J1_65(25.601,0) J1_66(25.601,-4.7) J1_67(26.401,0) J1_68(26.401,-4.7) J1_69(27.201,0) J1_70(27.201,-4.7) J1_71(28.001,0) J1_72(28.001,-4.7) J1_73(28.801,0) J1_74(28.801,-4.7) J1_75(29.601,0) J1_76(29.601,-4.7) J1_77(30.401,0) J1_78(30.401,-4.7) J1_79(31.201,0) J1_80(31.201,-4.7) J2_1(31.201,32.893) J2_2(31.201,37.593) J2_3(30.401,32.893) J2_4(30.401,37.593) J2_5(29.601,32.893) J2_6(29.601,37.593) J2_7(28.801,32.893) J2_8(28.801,37.593) J2_9(28.001,32.893) J2_10(28.001,37.593) J2_11(27.201,32.893) J2_12(27.201,37.593) J2_13(26.401,32.893) J2_14(26.401,37.593) J2_15(25.601,32.893) J2_16(25.601,37.593) J2_17(24.801,32.893) J2_18(24.801,37.593) J2_19(24.001,32.893) J2_20(24.001,37.593) J2_21(23.201,32.893) J2_22(23.201,37.593) J2_23(22.401,32.893) J2_24(22.401,37.593) J2_25(21.601,32.893) J2_26(21.601,37.593) J2_27(20.801,32.893) J2_28(20.801,37.593) J2_29(20.001,32.893) J2_30(20.001,37.593) J2_31(19.201,32.893) J2_32(19.201,37.593) J2_33(18.401,32.893) J2_34(18.401,37.593) J2_35(17.601,32.893) J2_36(17.601,37.593) J2_37(16.801,32.893) J2_38(16.801,37.593) J2_39(16.001,32.893) J2_40(16.001,37.593) J2_41(15.201,32.893) J2_42(15.201,37.593) J2_43(14.401,32.893) J2_44(14.401,37.593) J2_45(13.601,32.893) J2_46(13.601,37.593) J2_47(12.801,32.893) J2_48(12.801,37.593) J2_49(12.001,32.893) J2_50(12.001,37.593) J2_51(11.201,32.893) J2_52(11.201,37.593) J2_53(10.401,32.893) J2_54(10.401,37.593) J2_55(9.601,32.893) J2_56(9.601,37.593) J2_57(8.801,32.893) J2_58(8.801,37.593) J2_59(8.001,32.893) J2_60(8.001,37.593) J2_61(7.2,32.893) J2_62(7.2,37.593) J2_63(6.4,32.893) J2_64(6.4,37.593) J2_65(5.6,32.893) J2_66(5.6,37.593) J2_67(4.8,32.893) J2_68(4.8,37.593) J2_69(4,32.893) J2_70(4,37.593) J2_71(3.2,32.893) J2_72(3.2,37.593) J2_73(2.4,32.893) J2_74(2.4,37.593) J2_75(1.6,32.893) J2_76(1.6,37.593) J2_77(0.8,32.893) J2_78(0.8,37.593) J2_79(0,32.893) J2_80(0,37.593)
  round 1.3 hole 1.3 unplated: ""(-2.511,-2.35) ""(-2.511,35.243)
  round 0.9 hole 0.9 unplated: ""(33.74,-2.35) ""(33.74,35.243)
  silkscreen extent -5.59,-6.1 36.32,38.95

## Part data
C1 C2 C3 C4 C5 C6 C7 C24 C25 C26 C27 C129 C132 C134 C137: library part Cap, "Capacitor", LatestRevisionDate=17-Jul-2002, LatestRevisionNote="Re-released for DXP Platform.", PackageDescription="Radial Cap, Thru-Hole; 2 Leads; 0.3 in Pin Spacing", PackageReference=RAD-0.3, Published=8-Jun-2000, Publisher="Altium Limited"
C8 C9 C10 C12 C13 C14 C15 C16 C17 C18 C21 C22 C23 C30 C31 C33 C35 C37 C39 C42 C44 C45 C46 C47 C48 C113 C114 C115 C117 C119 C120 C122 C124 C126 C148 C213: library part CAPACITOR, "Generic Capacitor"
C127 C128 C130 C131 C133 C135 C136 C138: library part C
DONE S0: library part LED0, "Typical INFRARED GaAs LED", LatestRevisionDate=08-Jul-2005, LatestRevisionNote="Mech Layer 1 removed.", PackageDescription="LED; 2 Leads", PackageReference=LED-0, Published=8-Jun-2000, Publisher="Altium Limited"
G1 G2: library part FXO-HC5, "3.3V HCMOS Oscillator", Manufacturer="Fox Electronics"
L1 L2 L3 L4: BOM_Manufacturer=Sunlord, BOM_Manufacturer Part=MPL2520S100MWT, BOM_Supplier=LCSC, BOM_Supplier Part=C370039, Contributor=LCSC, nameAlias=Inductance, spicePre=L, spiceSymbolName=MPL2520S100MWT
M1: library part ZYNQ7010&7020, "ZYNQ7010&7020 Core Board"
P1: "Header, 3-Pin", LatestRevisionDate=17-Jul-2002, LatestRevisionNote="Re-released for DXP Platform.", Publisher="Altium Limited"
R1 R2 R3 R4 R5 R6 R7 R8 R9 R10 R11 R12 R17 R18 R19: library part Res1, "Resistor", LatestRevisionDate=17-Jul-2002, LatestRevisionNote="Re-released for DXP Platform.", PackageDescription="Axial Device, Thru-Hole; 2 Leads; 0.3 in Pin Spacing", PackageReference=AXIAL-0.3, Published=8-Jun-2000, Publisher="Altium Limited"
R13 R15 R16 R22 R28 R31 R32 R33 R34 R35 R36 R37 R38 R40 R42 R52 R53 R54 R55 R57 R58 R59 R60 R61 R62 R67 R69 R70 R98 R105: library part RESISTOR, "Generic Resistor"
RESET1 RESET2: "Switch", LatestRevisionDate=17-Jul-2002, LatestRevisionNote="Re-released for DXP Platform.", PackageDescription="Switch; 2 Leads", PackageReference=SPST-2, Published=24-Mar-1999, Publisher="Altium Limited"
RR1 RR2 RR3 RR4 RR5 RR6: library part "Res -4", "Isolated Resistor Network", Code_IPC=SOIC127P600-16, Code_JEDEC=MS-012-AC, LatestRevisionDate=29-May-2009, LatestRevisionNote="IPC-7351 Footprint Added.", PackageDescription="16-Pin Small Outline Integrated Circuit 1.27 mm Pitch", PackageReference=SO-16, Published=24-Mar-1999, Publisher="Altium Limited"
U1: library part XC7Z020-CLG400, "Zynq 7000 FPGA 20 Die, in a CSG 484 Package", Manufacturer=Xilinx
U5: library part N25Q12-F8, "Serial Flash Memory, 16Mbit, Low Voltage, 50MHz SPI Bus Interface", Manufacturer=Spansion
U6: library part MT41JxxxMxx, "DDR3 SDRAM 2Gb x4, x8, x16", Manufacturer=Micron
USB1: BOM_Manufacturer="SHOU HAN", BOM_Manufacturer Part="TYPE-C 6P", BOM_Supplier=LCSC, BOM_Supplier Part=C456012, Contributor=LCSC, spicePre=U, spiceSymbolName="TYPE-C 6P"
X1: library part "Header 6", "Header, 6-Pin", LatestRevisionDate=17-Jul-2002, LatestRevisionNote="Re-released for DXP Platform.", Publisher="Altium Limited"

## Via types
v1: diameter 18, hole 8, Top Layer to Bottom Layer, tented both sides, 692 vias
v2: diameter 40, hole 20, Top Layer to Bottom Layer, tented both sides, 2 vias

## Nets (pads, with @x,y where several pads share a name; then routed paths per layer and width w, separated by ;. In a path a pad name is that pad's centre, name@x,y a point inside that pad or via, vN(x,y) a via of type N, cw(c..) or ccw(c..) an arc to the next point about the centre after c; other vN are vias at no path point)
ADDR3-A0: RR4.5 U1.N2 U6.N3 | length 2156.4
  Top Layer w3.5: v1(542,1636) 542,1672 525,1689 525,1703 525,1754.5 530,1754.5 530,1761.5 525,1761.5 523.25,1761.5 523.25,1768.5 525,1768.5 530,1768.5 530,1775.5 525,1775.5 523.25,1775.5 523.25,1782.5 525,1782.5 530,1782.5 530,1789.5 525,1789.5 523.25,1789.5 523.25,1796.5 525,1796.5 530,1796.5 530,1803.5 525,1803.5 523.25,1803.5 523.25,1810.5 525,1810.5 530,1810.5 530,1817.5 525,1817.5 525,1824.5 525,1828 521.62,1831.38 516.67,1836.33 513.24,1832.9 508.3,1837.85 511.72,1841.28 516.27,1845.83 511.32,1850.78 506.77,1846.23 503.35,1842.8 498.4,1847.75 501.82,1851.18 506.37,1855.73 501.42,1860.68 496.87,1856.13 493.45,1852.7 488.5,1857.65 491.92,1861.08 496.47,1865.63 491.52,1870.58 486.97,1866.03 483.55,1862.6 478.6,1867.55 482.02,1870.98 486.57,1875.53 481.62,1880.48 477.07,1875.93 473.65,1872.5 468.7,1877.45 472.12,1880.88 476.67,1885.43 471.72,1890.38 467.17,1885.83 463.75,1882.4 458.8,1887.35 462.22,1890.78 466.78,1895.33 461.83,1900.28 457.27,1895.73 453.85,1892.3 448.9,1897.25 452.32,1900.68 456.88,1905.23 451.93,1910.18 447.37,1905.63 443.95,1902.2 439,1907.15 442.42,1910.58 437.47,1915.53 435,1918 435,2095.6 460.4,2121 463.9,2121 470.9,2121 477.9,2121 477.9,2127 484.9,2127 484.9,2121 491.9,2121 491.9,2127 498.9,2127 498.9,2121 505.9,2121 505.9,2127 512.9,2127 512.9,2121 519.9,2121 519.9,2127 526.9,2127 526.9,2121 533.9,2121 533.9,2127 540.9,2127 540.9,2121 547.9,2121 547.9,2127 554.9,2127 554.9,2121 561.9,2121 561.9,2127 568.9,2127 568.9,2121 575.9,2121 582.9,2121 586,2121 596.5,2121 600,2121 607,2121 609.47,2118.53 614.42,2113.58 619.37,2108.63 613.82,2103.07 618.77,2098.12 624.32,2103.68 629.27,2098.73 623.72,2093.17 628.67,2088.23 634.22,2093.78 639.17,2088.83 633.62,2083.28 638.57,2078.33 644.12,2083.88 649.07,2078.93 654.02,2073.98 657.57,2070.43 708.13,2019.87 760.64,2019.87 767.64,2019.87 774.64,2019.87 781.64,2019.87 788.64,2019.87 795.64,2019.87 802.64,2019.87 809.64,2019.87 809.64,2023.97 816.64,2023.97 816.64,2019.87 823.64,2019.87 827.14,2019.87 831.99,2024.72 836.94,2029.67 842.86,2023.75 847.81,2028.7 841.89,2034.62 834.79,2041.72 839.74,2046.67 846.84,2039.57 851.79,2044.52 U6.N3@854.27,2046.99 v1(838.52,2062.74) ; v1(876,1587) 876,1497.3 U1.N2@891.95,1481.35
  Bottom Layer w3.5: v1(542,1636) 586,1636 606,1616 852,1616 876,1592 v1(876,1587) ; RR4.5@779.4,2291 779.4,2243.6 841.25,2181.75 841.25,2120.25 822,2101 822,2077 836.26,2062.74 v1(838.52,2062.74)
ADDR3-A1: RR2.7 U1.K2 U6.P7 | length 2269.2
  Top Layer w3.5: v1(650,1678) 638,1690 638,1840 599.5,1878.5 522.37,1955.63 529.88,1963.13 524.93,1968.08 517.42,1960.58 512.47,1965.53 510,1968 510,1968.5 510,1975.5 503.07,1975.5 503.07,1982.5 510,1982.5 524.93,1982.5 524.93,1989.5 510,1989.5 503.07,1989.5 503.07,1996.5 510,1996.5 524.93,1996.5 524.93,2003.5 510,2003.5 503.07,2003.5 503.07,2010.5 510,2010.5 531.54,2010.5 531.54,2017.5 510,2017.5 510,2024.5 510,2028 513.58,2031.58 518.53,2036.53 521,2039 524.5,2039 531.5,2039 538.5,2039 542,2039 544.23,2036.77 549.18,2031.82 539.35,2022 544.3,2017.05 554.13,2026.87 560.63,2033.38 565.58,2028.43 559.08,2021.92 555.57,2018.42 560.52,2013.47 564.03,2016.97 570.53,2023.48 575.48,2018.53 568.98,2012.02 565.47,2008.52 570.42,2003.57 573.93,2007.07 580.43,2013.58 585.38,2008.63 578.88,2002.12 575.37,1998.62 580.32,1993.67 583.83,1997.17 590.33,2003.68 595.28,1998.73 588.78,1992.22 585.27,1988.72 590.22,1983.77 593.73,1987.27 600.23,1993.78 605.18,1988.83 598.68,1982.32 595.17,1978.82 600.12,1973.87 603.63,1977.37 610.13,1983.88 615.08,1978.93 608.58,1972.42 613.53,1967.47 616,1965 621.28,1965 628.28,1965 628.28,1962.35 635.28,1962.35 635.28,1965 635.28,1966.93 642.28,1966.93 642.28,1965 642.28,1962.35 649.28,1962.35 649.28,1965 649.28,1966.93 656.28,1966.93 656.28,1965 656.28,1962.35 663.28,1962.35 663.28,1965 663.28,1966.93 670.28,1966.93 670.28,1965 670.28,1962.35 677.28,1962.35 677.28,1965 677.28,1966.93 684.28,1966.93 684.28,1965 684.28,1962.35 691.28,1962.35 691.28,1965 691.28,1966.93 698.28,1966.93 698.28,1965 698.28,1962.35 705.28,1962.35 705.28,1965 705.28,1966.93 712.28,1966.93 712.28,1965 712.28,1962.35 719.28,1962.35 719.28,1965 719.28,1966.93 726.28,1966.93 726.28,1965 726.28,1962.35 733.28,1962.35 733.28,1965 733.28,1966.93 740.28,1966.93 740.28,1965 740.28,1962.35 747.28,1962.35 747.28,1965 747.28,1966.93 754.28,1966.93 754.28,1965 754.28,1962.35 761.28,1962.35 761.28,1965 761.28,1966.93 768.28,1966.93 768.28,1965 775.28,1965 778.78,1965 780.53,1963.25 785.48,1958.3 779.81,1952.64 784.76,1947.69 790.43,1953.35 792.9,1950.88 v1(807.02,1936.76) U6.P7@822.77,1921.01 ; v1(956.45,1601.96) 956.45,1596.55 970,1583 970,1497.8 U1.K2@986.45,1481.35
  Bottom Layer w3.5: RR2.7@535.64,2291 535.64,2137.36 677,1996 789,1996 807.02,1977.98 v1(807.02,1936.76) ; v1(650,1678) 650,1675 648,1673 746,1673 768,1695 874.9,1695 956.45,1613.45 v1(956.45,1601.96)
ADDR3-A2: RR4.7 U1.M3 U6.P3 | length 2251.8
  Top Layer w3.5: v1(515,1671) 516.25,1672.25 516.25,1820 428,1908.25 428,2098.5 451.13,2121.63 449.5,2123.26 454.45,2128.21 456.08,2126.58 461.03,2131.53 463.5,2134 573.5,2134 573.5,2138.97 580.5,2138.97 580.5,2134 580.5,2128.03 587.5,2128.03 587.5,2134 587.5,2138.97 594.5,2138.97 594.5,2134 594.5,2128.03 601.5,2128.03 601.5,2134 601.5,2138.97 608.5,2138.97 608.5,2134 615.5,2134 619,2134 619.71,2133.29 624.66,2128.34 617.14,2120.81 622.08,2115.86 629.61,2123.39 637.14,2130.92 642.09,2125.97 634.56,2118.44 627.03,2110.91 631.98,2105.96 639.51,2113.49 647.04,2121.02 651.99,2116.07 644.46,2108.54 636.93,2101.01 641.88,2096.06 649.41,2103.59 656.94,2111.12 661.89,2106.17 654.36,2098.64 646.83,2091.11 651.78,2086.16 659.31,2093.69 666.84,2101.22 671.79,2096.27 664.26,2088.74 656.73,2081.21 661.68,2076.26 669.21,2083.79 676.74,2091.32 681.69,2086.37 674.16,2078.84 666.63,2071.31 671.58,2066.36 679.11,2073.89 686.64,2081.42 691.59,2076.47 684.06,2068.94 676.53,2061.41 681.48,2056.46 689.01,2063.99 696.54,2071.52 701.49,2066.57 693.96,2059.04 686.43,2051.51 691.38,2046.56 698.91,2054.09 706.44,2061.62 711.38,2056.67 703.86,2049.14 696.33,2041.62 701.28,2036.67 708.81,2044.19 716.33,2051.72 721.28,2046.77 713.76,2039.24 706.36,2031.84 711.31,2026.89 718.71,2034.29 723.66,2029.34 726.13,2026.87 729.15,2026.87 736.15,2026.87 743.15,2026.87 750.15,2026.87 757.15,2026.87 764.15,2026.87 771.15,2026.87 778.15,2026.87 785.15,2026.87 792.15,2026.87 799.15,2026.87 802.65,2026.87 805.29,2029.51 810.23,2034.46 812.71,2036.93 U6.P3@822.77,2046.99 v1(807.02,2062.74) ; v1(907.7,1465.6) U1.M3@923.45,1449.85
  Bottom Layer w3.5: v1(515,1671) 528,1658 587,1658 599,1646 870.7,1646 907.7,1609 v1(907.7,1465.6) ; RR4.7@739.24,2291 739.24,2154.01 790.83,2102.43 790.83,2082.17 807.02,2065.98 v1(807.02,2062.74)
ADDR3-A3: RR5.8 U1.K3 U6.N2 | length 2191.2
  Top Layer w3.5: v1@453.95,1769.05 377,1846 377,2100.3 478.7,2202 762,2202 772.83,2191.17 786.17,2204.52 791.12,2199.57 777.78,2186.22 782.73,2181.27 805.97,2204.52 810.92,2199.57 787.68,2176.32 792.63,2171.37 819.7,2198.44 824.65,2193.5 797.58,2166.42 802.53,2161.47 805,2159 812.02,2159 819.02,2159 822.52,2159 838.52,2143 v1(838.52,2094.24) U6.N2@854.27,2078.49 ; U1.K3@986.45,1449.85 v1(1002.2,1465.6)
  Bottom Layer w3.5: v1@454,1770.25 538.75,1770.25 567,1742 698,1742 715.25,1759.25 891.75,1759.25 977.5,1673.5 993.5,1673.5 1013,1654 1013,1597 1002.2,1586.2 v1(1002.2,1465.6) ; RR5.8@820.57,2291 820.57,2215.43 848.25,2187.75 848.25,2110.25 838.52,2100.52 v1(838.52,2094.24)
  other v1: 454,1769
ADDR3-A4: RR1.6 U1.M4 U6.P8 | length 2119.6
  Top Layer w3.5: v1(807.28,1905.27) U6.P8@823.03,1889.52 ; v1(815,1665) 807.02,1672.98 807.02,1700 807.02,1723.26 860.03,1723.26 860.03,1730.26 807.02,1730.26 802.34,1730.26 802.34,1737.26 807.02,1737.26 860.03,1737.26 860.03,1744.26 807.02,1744.26 802.34,1744.26 802.34,1751.26 807.02,1751.26 860.03,1751.26 860.03,1758.26 807.02,1758.26 802.34,1758.26 802.34,1765.26 807.02,1765.26 860.03,1765.26 860.03,1772.26 807.02,1772.26 802.34,1772.26 802.34,1779.26 807.02,1779.26 860.03,1779.26 860.03,1786.26 807.02,1786.26 802.34,1786.26 802.34,1793.26 807.02,1793.26 850.87,1793.26 850.87,1800.26 807.02,1800.26 802.34,1800.26 802.34,1807.26 807.02,1807.26 836.87,1807.26 836.87,1814.26 807.02,1814.26 802.34,1814.26 802.34,1821.26 807.02,1821.26 809.67,1821.26 809.67,1828.26 807.02,1828.26 807.02,1835.26 807.02,1842.26 804.92,1842.26 804.92,1849.26 807.02,1849.26 808.79,1849.26 808.79,1856.26 807.02,1856.26 805.27,1856.26 805.27,1863.26 807.02,1863.26 807.02,1870.26 807.02,1873.76 U6.P8@822.77,1889.51 ; v1(907.7,1434.1) U1.M4@923.45,1418.35
  Bottom Layer w3.5: RR1.6@453.53,2291 453.53,2181.47 661,1974 675,1974 728,1921 791.55,1921 v1(807.28,1905.27) ; v1(815,1665) 823.5,1656.5 826,1654 880,1654 914.7,1619.3 914.7,1574.3 924.75,1564.25 933.75,1564.25 937,1561 939.47,1558.53 943,1555 943,1545.1 940.53,1542.63 935.58,1537.68 933.2,1540.05 928.25,1535.1 930.63,1532.73 925.68,1527.78 921.95,1524.05 921.95,1520.55 921.95,1513.55 949,1513.55 949,1506.55 921.95,1506.55 914.7,1506.55 914.7,1499.55 921.95,1499.55 949,1499.55 949,1492.55 921.95,1492.55 914.7,1492.55 914.7,1485.55 921.95,1485.55 933.31,1485.55 933.31,1478.55 921.95,1478.55 921.95,1471.55 921.95,1468 921.95,1445.95 910.1,1434.1 v1(907.7,1434.1)
ADDR3-A5: RR4.6 U1.L1 U6.P2 | length 2183.5
  Top Layer w3.5: v1(476,1699) 473.75,1701.25 473.75,1780.25 384,1870 384,2097.4 475.1,2188.5 550.02,2188.5 550.02,2194.9 557.02,2194.9 557.02,2188.5 557.02,2182.1 564.02,2182.1 564.02,2188.5 564.02,2194.9 571.02,2194.9 571.02,2188.5 571.02,2182.1 578.02,2182.1 578.02,2188.5 578.02,2194.9 585.02,2194.9 585.02,2188.5 585.02,2182.1 592.02,2182.1 592.02,2188.5 592.02,2194.9 599.02,2194.9 599.02,2188.5 599.02,2182.1 606.02,2182.1 606.02,2188.5 606.02,2194.9 613.02,2194.9 613.02,2188.5 613.02,2182.1 620.02,2182.1 620.02,2188.5 620.02,2194.9 627.02,2194.9 627.02,2188.5 627.02,2182.1 634.02,2182.1 634.02,2188.5 634.02,2194.9 641.02,2194.9 641.02,2188.5 641.02,2182.1 648.02,2182.1 648.02,2188.5 648.02,2194.9 655.02,2194.9 655.02,2188.5 655.02,2182.1 662.02,2182.1 662.02,2188.5 662.02,2194.9 669.02,2194.9 669.02,2188.5 669.02,2182.1 676.02,2182.1 676.02,2188.5 676.02,2194.9 683.02,2194.9 683.02,2188.5 690.02,2188.5 690.02,2194.9 697.02,2194.9 697.02,2188.5 704.02,2188.5 704.02,2194.9 711.02,2194.9 711.02,2188.5 718.02,2188.5 718.02,2194.9 725.02,2194.9 725.02,2188.5 732.02,2188.5 732.02,2194.9 739.02,2194.9 739.02,2188.5 739.02,2178.5 746.02,2178.5 746.02,2188.5 753.02,2188.5 756.52,2188.5 756.89,2188.13 761.84,2183.18 766.31,2187.66 771.26,2182.71 766.79,2178.23 771.74,2173.28 776.21,2177.76 781.16,2172.81 776.69,2168.34 781.64,2163.39 786.11,2167.86 791.06,2162.91 786.59,2158.44 791.54,2153.49 794.01,2151.01 807.02,2138 v1(807.02,2094.24) U6.P2@822.77,2078.49 ; v1(942,1586) 954.85,1573.15 U1.L1@954.85,1512.85
  Bottom Layer w3.5: v1@476,1701 505.26,1701 541.26,1665 589.9,1665 591.9,1663 750,1663 773.25,1686.25 873.75,1686.25 942,1618 v1(942,1586) ; RR4.6@758.93,2291 758.93,2223.07 807.02,2174.98 v1(807.02,2094.24)
ADDR3-A6: RR1.7 U1.L4 U6.R8 | length 2218.4
  Top Layer w3.5: v1(775.79,1905.27) U6.R8@791.54,1889.52 ; v1(788,1668) 775.53,1680.47 775.53,1687 775.53,1688.26 665.54,1688.26 665.54,1695.26 775.53,1695.26 794.37,1695.26 794.37,1702.26 775.53,1702.26 650.65,1702.26 650.65,1709.26 775.53,1709.26 794.37,1709.26 794.37,1716.26 775.53,1716.26 768.21,1716.26 768.21,1723.26 775.53,1723.26 794.37,1723.26 794.37,1730.26 775.53,1730.26 769.9,1730.26 769.9,1737.26 775.53,1737.26 794.37,1737.26 794.37,1744.26 775.53,1744.26 751.29,1744.26 751.29,1751.26 775.53,1751.26 794.37,1751.26 794.37,1758.26 775.53,1758.26 775.53,1765.26 794.37,1765.26 794.37,1772.26 775.53,1772.26 775.53,1779.26 794.37,1779.26 794.37,1786.26 775.53,1786.26 775.53,1793.26 794.37,1793.26 794.37,1800.26 775.53,1800.26 744.65,1800.26 744.65,1807.26 775.53,1807.26 794.37,1807.26 794.37,1814.26 775.53,1814.26 752.96,1814.26 752.96,1821.26 775.53,1821.26 777.28,1821.26 777.28,1828.26 775.53,1828.26 775.53,1835.26 775.53,1842.26 773.78,1842.26 773.78,1849.26 775.53,1849.26 777.28,1849.26 777.28,1856.26 775.53,1856.26 773.78,1856.26 773.78,1863.26 775.53,1863.26 775.53,1870.26 775.53,1873.76 U6.R8@791.28,1889.51 ; v1(939.1,1434.1) U1.L4@954.85,1418.35
  Bottom Layer w3.5: RR1.7@433.84,2291 433.84,2188.16 716.73,1905.27 v1(775.79,1905.27) ; v1(788,1668) 789,1668 800.25,1679.25 868.75,1679.25 921,1627 921,1622.9 921.7,1622.2 921.7,1586.15 936.6,1571.25 938.01,1571.25 956,1553.26 956,1451 v1(939.1,1434.1)
ADDR3-A7: RR4.8 U1.K4 U6.R2 | length 2278.9
  Top Layer w3.5: v1@501,1724.64 v1(501,1723) 487.25,1736.75 487.25,1793.75 394,1887 394,2097.5 471.5,2175 680.03,2175 680.03,2137.37 687.03,2137.37 687.03,2175 687.03,2180.78 694.03,2180.78 694.03,2175 694.03,2132.79 701.03,2132.79 701.03,2175 701.03,2180.78 708.03,2180.78 708.03,2175 708.03,2146.79 715.03,2146.79 715.03,2175 715.03,2180.78 722.03,2180.78 722.03,2175 729.03,2175 732.53,2175 733.45,2174.07 738.4,2169.12 735.64,2166.36 740.59,2161.41 743.35,2164.17 756.64,2177.46 761.59,2172.51 748.3,2159.22 745.53,2156.46 750.48,2151.51 753.25,2154.27 766.54,2167.56 771.49,2162.61 758.2,2149.32 749.91,2141.03 754.86,2136.08 763.15,2144.37 776.44,2157.66 781.39,2152.71 768.1,2139.42 773.05,2134.47 775.53,2132 775.53,2130.62 775.53,2123.62 771.83,2123.62 771.83,2116.62 775.53,2116.62 775.53,2113.12 v1(775.53,2094.24) U6.R2@791.28,2078.49 ; v1(970.7,1434.1) U1.K4@986.45,1418.35
  Bottom Layer w3.5: v1(501,1723) 529,1695 758.1,1695 765.1,1702 882.74,1702 970.7,1614.04 970.7,1527.77 970,1527.07 970,1434.8 v1(970.7,1434.1) ; RR4.8@718.77,2291 718.77,2128.23 739.75,2107.25 762.51,2107.25 v1(775.53,2094.24)